# Altium PCB W-F-DX-C1_Display_PCB_wihout3D.PcbDoc
Units mm, origin at the board's own origin, x right, y up, seen from the top; angles counter-clockwise.
Board outline 48.13 x 93.97 mm, 2 copper layers (Top Layer, Bottom Layer); 49 components, 45 nets, 151 pads, 19 vias.
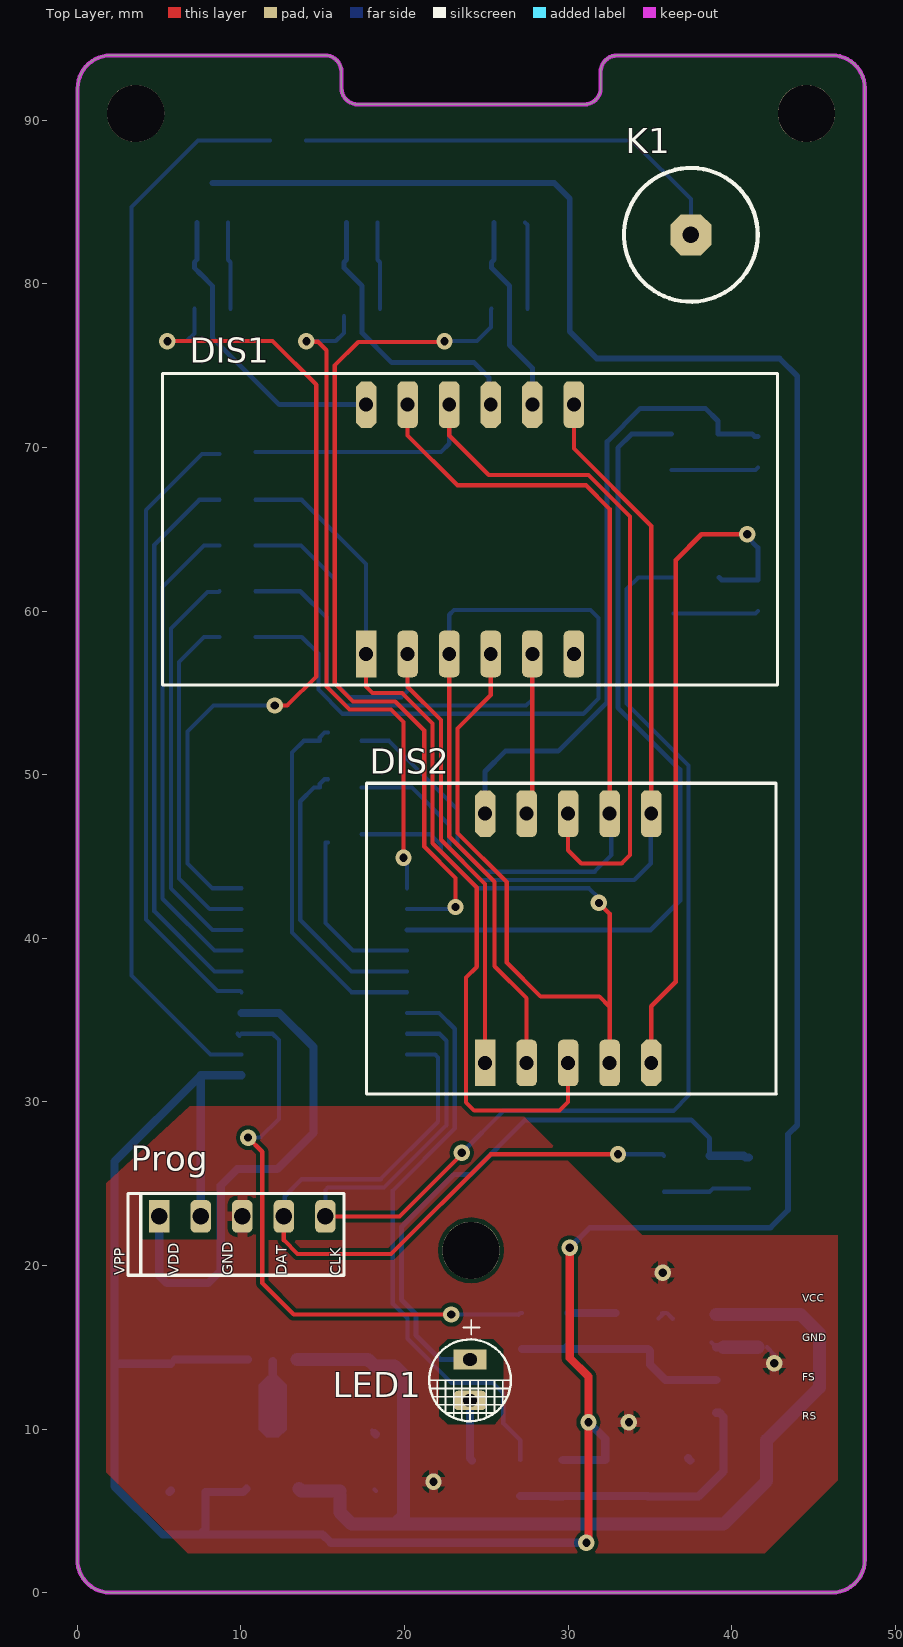
[diagram p0: Top Layer view]
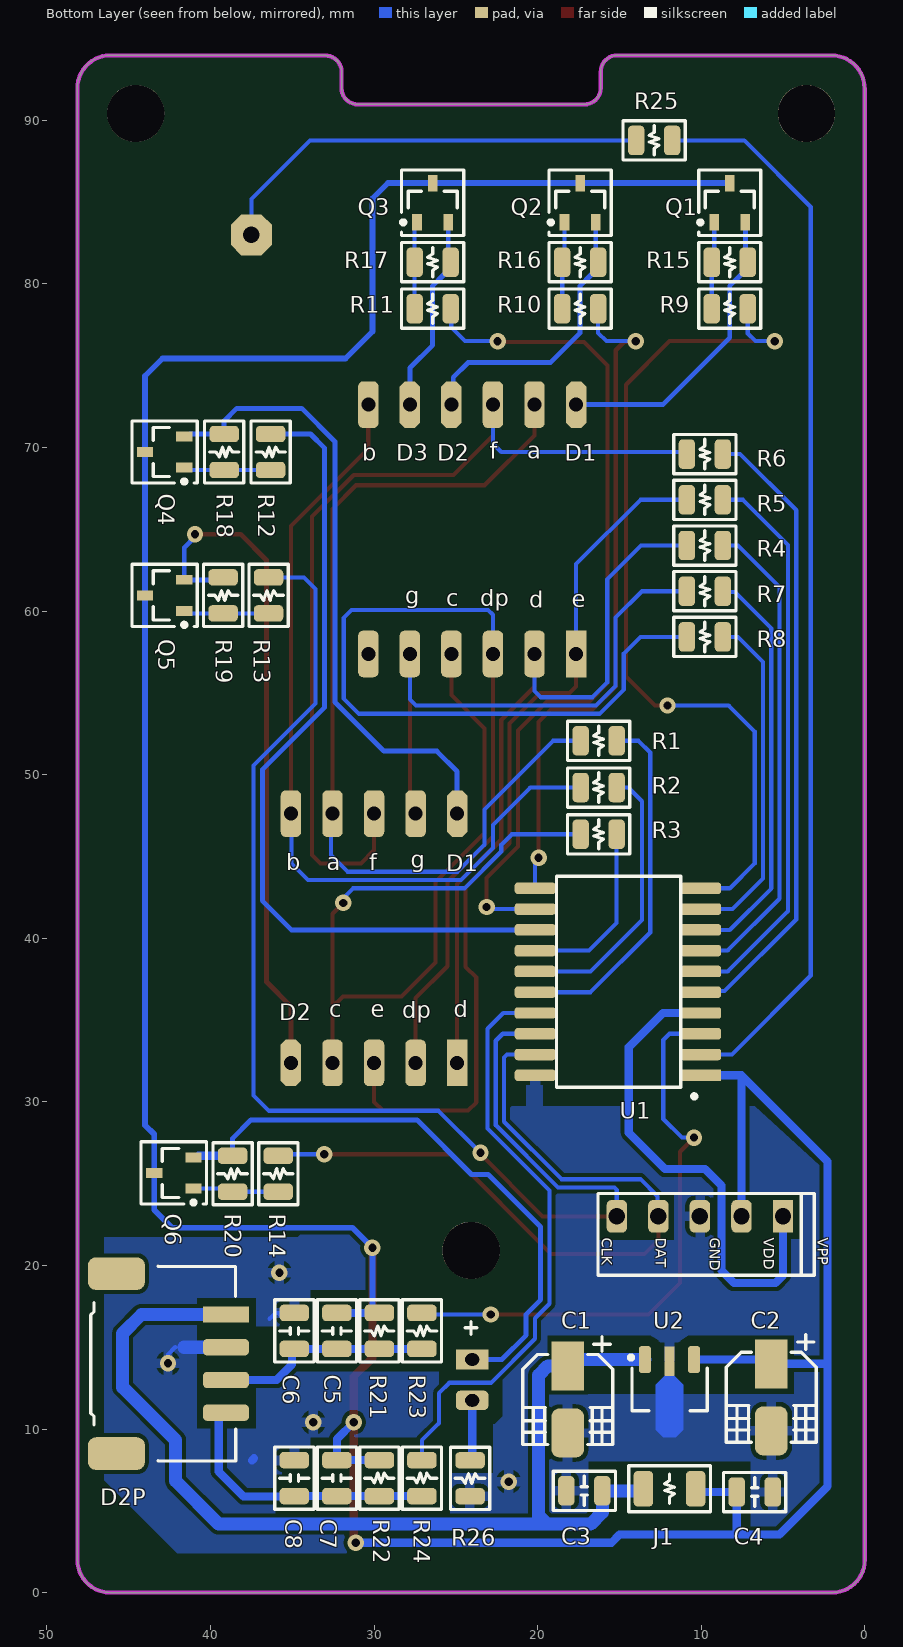
[diagram p1: Bottom Layer view, seen from below]
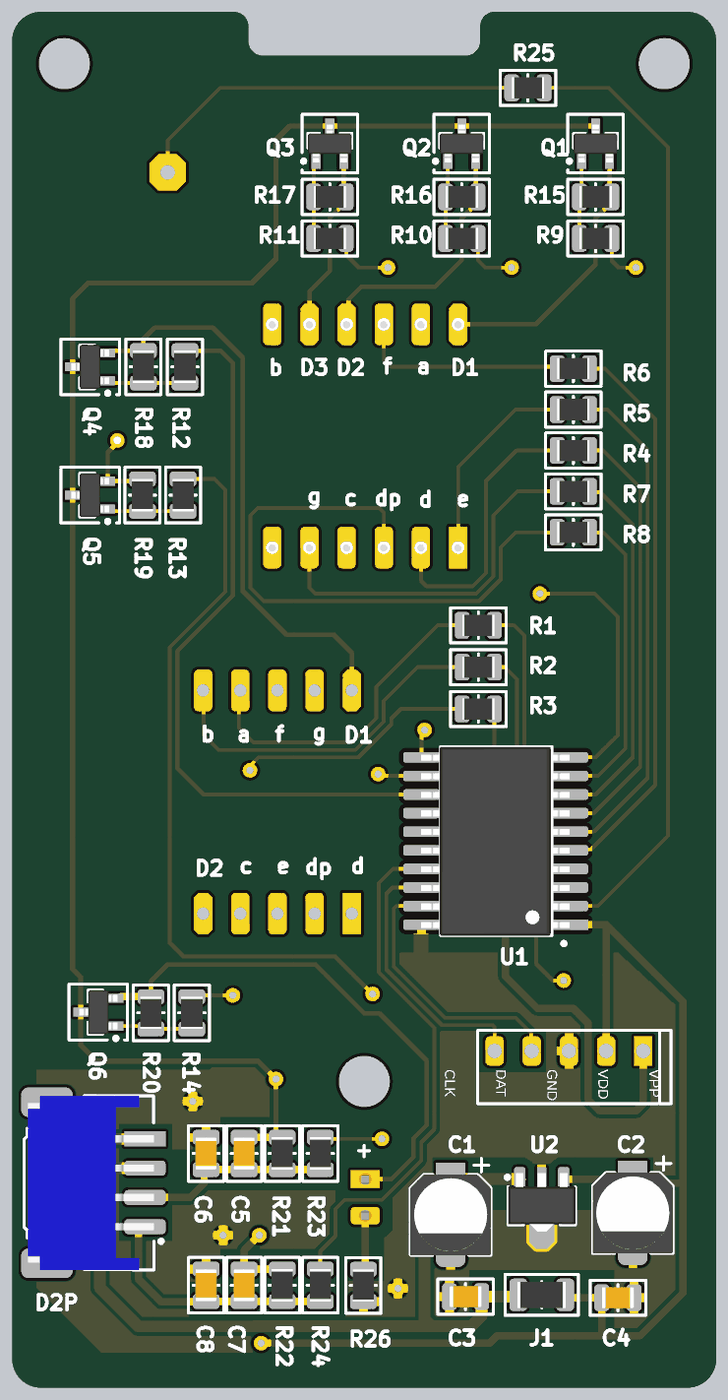
[diagram p2: 3D render of the assembled board from below, using the file's embedded part models]

## Layer stack, top to bottom
Top Solder: solder mask 0.0102, Solder Resist, Dk 3.5
Top Layer: signal copper 0.0356
Dielectric 1: dielectric 0.32, FR-4, Dk 4.8
Bottom Layer: signal copper 0.0356
Bottom Solder: solder mask 0.0102, Solder Resist, Dk 3.5

## Board outline
2,0.002 cw(c2,2.002) 0,2.002 0,91.954 0.015,91.954 cw(c2.031,91.954) 2.031,93.97 15.142,93.97 cw(c15.142,92.97) 16.142,92.97 16.145,92.97 16.145,91.97 ccw(c17.145,91.97) 17.145,90.97 30.988,90.97 ccw(c30.988,91.97) 31.988,91.97 31.984,92.963 cw(c32.984,92.963) 32.984,93.963 32.984,93.97 46.135,93.97 cw(c46.135,91.97) 48.135,91.97 48.135,2.002 48.133,2.002 cw(c46.133,2.002) 46.133,0.002 46.133,0

## Design rules (kind name [scope] priority, off if disabled: settings)
Clearance [All] p1: gap=0.254 ignorepadtopadclearanceinfootprint=TRUE except(0: Arc-Hole Track-Hole SMDPad-Hole THPad-Hole Via-Hole Fill-Hole Poly-Hole Region-Hole Text-Hole)
HoleSize [All] p1: absolutevalues=TRUE maxlimit=5 minlimit=0.3 maxpercent=80.000 minpercent=20.000
MinimumSolderMaskSliver [All] p1: minsoldermaskwidth=0.08
PasteMaskExpansion [All] p1: expansion=0.01
PolygonConnect [All] p1: connectstyle=Relief reliefconductorwidth=0.6 reliefentries=4 polygonreliefangle="90 Angle" airgapwidth=0.254
RoutingVias [All] p1: holewidth=0.5 width=1 viastyle="Through Hole" minholewidth=0.3 minwidth=1 maxholewidth=0.7 maxwidth=1.5
SilkToSolderMaskClearance [IsPad] p1: minsilkscreentomaskgap=0.152 clearancetoexposedcopper=TRUE
SolderMaskExpansion [All] p1: expansion=0.2 istentingtop=FALSE
UnRoutedNet [All] p1: checkbadconnections=TRUE
Width "Power & Ground" [(InNet('GND') AND InNet('VCC') AND InNet('VDD') AND InNet('VPP') AND InNet('dis11') AND InNet('dis12') AND InNet('dis13') AND InNet('dis21') AND InNet('dis22') AND InNet('eco'))] p1: maxlimit=1.5 minlimit=0.3 preferedwidth=0.35
Width [All] p2: maxlimit=5 minlimit=0.254 preferedwidth=0.254
25 further rules are at their usual default settings.

## Components (designator, comment, footprint, x,y, rotation, side; value= is the part's Value field where it differs from the comment)
C1 "C_SMD_5X5.4_CK-47uF-16V" C_SMD_5X5.4_CK-47uF-16V 18.161,11.811 r270 bottom locked
C2 "C_SMD_5X5.4_CK-47uF-16V" C_SMD_5X5.4_CK-47uF-16V 5.715,11.938 r270 bottom locked
C3 "0805 16volts 0.1uF 10%" C_0805 17.145,6.223 r0 bottom locked
C4 "0805 16volts 0.1uF 10%" C_0805 6.731,6.15 r180 bottom locked
C5 "0805 16volts 0.1uF 10%" C_0805 32.273,16 r270 bottom locked
C6 "0805 16volts 0.1uF 10%" C_0805 34.873,16 r270 bottom locked
C7 "0805 16volts 0.1uF 10%" C_0805 32.273,7 r270 bottom locked
C8 "0805 16volts 0.1uF 10%" C_0805 34.873,7 r270 bottom locked
D2P "SM04B-GHS-SMT" CN_4P_A2001WR-S-XP-LCP 42,14 r180 bottom locked
DIS1 "Display_3Digits Seven Segment" "DIS_56\" 3 digit Display" 24,65 r0 top locked
DIS2 "Display_2Digits Seven Segment" "Dis_56\" 2 digit Display" 30,40 r0 top locked
J1 "1206 0Ω 5%" R_1206 11.938,6.35 r180 bottom locked
K1 "TouchSpring-15H-8W-0.5C" T_TouchSpring-15H-8W-0.5C 37.5,83 r0 top locked
LED1 "LED_Diffuse_Green_3x5_P2.5" LED_3x5_P2.5 24,13 r270 top locked
Prog "Connector_PIC_Burn" CN_PIC_MCU_Debugger 5,23 r90 top locked
Q1 "SOT-23-3, BC 847" Q_SOT-23-3_NPN_BC847 8.255,84.963 r180 bottom locked
Q2 "SOT-23-3, BC 847" Q_SOT-23-3_NPN_BC847 17.399,84.963 r180 bottom locked
Q3 "SOT-23-3, BC 847" Q_SOT-23-3_NPN_BC847 26.416,84.963 r180 bottom locked
Q4 "SOT-23-3, BC 847" Q_SOT-23-3_NPN_BC847 42.799,69.723 r90 bottom locked
Q5 "SOT-23-3, BC 847" Q_SOT-23-3_NPN_BC847 42.799,60.96 r90 bottom locked
Q6 "SOT-23-3, BC 847" Q_SOT-23-3_NPN_BC847 42.24,25.654 r90 bottom locked
R1 "0805 220Ω 250mW 5%" R_0805 16.269,52.07 r0 bottom locked
R2 "0805 220Ω 250mW 5%" R_0805 16.269,49.212 r0 bottom locked
R3 "0805 220Ω 250mW 5%" R_0805 16.269,46.355 r0 bottom locked
R4 "0805 220Ω 250mW 5%" R_0805 9.779,64.008 r0 bottom locked
R5 "0805 220Ω 250mW 5%" R_0805 9.779,66.802 r0 bottom locked
R6 "0805 220Ω 250mW 5%" R_0805 9.779,69.596 r0 bottom locked
R7 "0805 220Ω 250mW 5%" R_0805 9.779,61.214 r0 bottom locked
R8 "0805 220Ω 250mW 5%" R_0805 9.779,58.42 r0 bottom locked
R9 "0805 1KΩ 250mW 5%" R_0805 8.255,78.486 r0 bottom locked
R10 "0805 1KΩ 250mW 5%" R_0805 17.399,78.486 r0 bottom locked
R11 "0805 1KΩ 250mW 5%" R_0805 26.416,78.486 r0 bottom locked
R12 "0805 1KΩ 250mW 5%" R_0805 36.322,69.723 r270 bottom locked
R13 "0805 1KΩ 250mW 5%" R_0805 36.449,60.96 r270 bottom locked
R14 "0805 1KΩ 250mW 5%" R_0805 35.852,25.604 r270 bottom locked
R15 "0805 22KΩ 250mW 5%" R_0805 8.255,81.325 r180 bottom locked
R16 "0805 22KΩ 250mW 5%" R_0805 17.399,81.325 r180 bottom locked
R17 "0805 22KΩ 250mW 5%" R_0805 26.416,81.325 r180 bottom locked
R18 "0805 22KΩ 250mW 5%" R_0805 39.161,69.723 r90 bottom locked
R19 "0805 22KΩ 250mW 5%" R_0805 39.224,60.96 r90 bottom locked
R20 "0805 22KΩ 250mW 5%" R_0805 38.646,25.604 r90 bottom locked
R21 "0805 10KΩ 250mW 1%" R_0805 29.673,16 r270 bottom locked
R22 "0805 10KΩ 250mW 1%" R_0805 29.673,7 r270 bottom locked
R23 "0805 22KΩ 250mW 5%" R_0805 27.073,16 r270 bottom locked
R24 "0805 22KΩ 250mW 5%" R_0805 27.073,7 r270 bottom locked
R25 "0805 1KΩ 250mW 5%" R_0805 12.878,88.773 r180 bottom locked
R26 "0805 3.6KΩ 250mW 5%" R_0805 24.13,6.985 r90 bottom locked
U1 "IC_PIC16F15344_SOIC" U_PIC16F1XXXX_20pin_SOIC 15.126,37.338 r0 bottom locked
U2 "CJ78L05 Three-terminal positive voltage regulator" U_CJ78L05_SOT89 11.938,12.446 r270 bottom locked

## Footprints (in the part's own frame and the unit in brackets; to place one, negate y for a bottom-side part, rotate by r counter-clockwise, add the part's x,y. Pads: shape width x height; smd on the part's side, far side on the other; paste and mask are expansions set on the pad)
C_0805 [mm]
  rrect50% 1x1.8 smd: 1(-1.1,0) 2(1.1,0)
  silkscreen extent -1.9,-1.2 1.9,1.2, body extent -1.1,-0.72 1.1,0.72, height 1
C_SMD_5X5.4_CK-47uF-16V [mm] "Aluminum Electrolytic Capacitor, Body 5.30x5.30x5.80mm, IPC Low Density"
  rect 3x2 smd: 1(-2.05,0)
  rrect50% 3x2 smd: 2(2.05,0)
  silkscreen extent -3.85,-2.75 2.75,2.75, body extent -2.77,-2.75 2.77,2.75, height 5.8
CN_4P_A2001WR-S-XP-LCP [mm]
  rrect50% 3.5x2 smd: 0(-3.75,-5.5) 0(-3.75,5.5)
  rrect50% 2.8x1 smd: 1(2.95,-3) 2(2.95,-1) 3(2.95,1)
  rect 2.8x1 smd: 4(2.95,3)
  round 0.5 on Bottom Overlay: ""(4.05,-4)
  silkscreen extent -5.31,-5.95 3.55,5.94, body extent -5.05,-5.95 3.55,5.95, height 5.6
CN_PIC_MCU_Debugger [mm]
  rect 2x1.25 hole 1: 1(0,0)
  rrect50% 2x1.25 hole 1: 2(0,-2.54) 3(0,-5.08) 4(0,-7.62) 5(0,-10.16)
  silkscreen extent -3.6,-11.3 1.4,1.9
"Dis_56\" 2 digit Display" [mm]
  rect 1.25x2.85 hole 0.85: 1(-5.08,-7.62)
  rrect50% 1.25x2.85 hole 0.85: 2(-2.54,-7.62) 3(0,-7.62) 4(2.54,-7.62) 6(5.08,7.62) 7(2.54,7.62) 8(0,7.62) 9(-2.54,7.62)
  oct 1.25x2.85 hole 0.85: 5(5.08,-7.62) 10(-5.08,7.62)
  silkscreen extent -12.32,-9.52 12.72,9.48, body extent -12.32,-9.52 12.72,9.61, height 7
"DIS_56\" 3 digit Display" [mm]
  rect 1.25x2.85 hole 0.85: 1(-6.35,-7.62)
  rrect50% 1.25x2.85 hole 0.85: 2(-3.81,-7.62) 3(-1.27,-7.62) 4(1.27,-7.62) 5(3.81,-7.62) 6(6.35,-7.62) 7(6.35,7.62) 10(-1.27,7.62) 11(-3.81,7.62)
  oct 1.25x2.85 hole 0.85: 8(3.81,7.62) 9(1.27,7.62) 12(-6.35,7.62)
  silkscreen extent -18.8,-9.53 18.8,9.53, body extent -18.8,-9.52 18.8,9.48, height 8.1
LED_3x5_P2.5 [mm]
  rect 1.2x2 hole 0.85 slot 0.75 at 0 deg: 1(-1.25,0)
  rrect50% 1.2x2 hole 0.85 slot 0.75 at 0 deg: 2(1.25,0)
  silkscreen extent -3.67,-2.5 2.52,2.5, body extent -1.97,-1.5 2.01,1.99, height 5.38
Q_SOT-23-3_NPN_BC847 [mm] "SOT23, 3-Leads, Body 2.90x2.45mm, Pitch 0.95mm, IPC Medium Density"
  rect 0.6x1 smd: 1(-0.95,-1.2) 2(0.95,-1.2) 3(0,1.2)
  silkscreen extent -1.93,-2 1.9,2, body extent -1.5,-1.3 1.5,1.3, height 1.15
R_0805 [mm]
  rrect50% 1x1.8 smd: 1(-1.1,0) 2(1.1,0)
  silkscreen extent -1.9,-1.2 1.9,1.2, body extent -1.1,-0.72 1.1,0.72, height 0.65
R_1206 [mm]
  rrect50% 1.2x2.2 smd: 1(-1.6,0) 2(1.6,0)
  silkscreen extent -2.5,-1.4 2.5,1.4, body extent -1.65,-0.9 1.65,0.9, height 0.65
T_TouchSpring-15H-8W-0.5C [mm]
  oct 2.5x2.5 hole 1: 1(0,0)
  silkscreen extent -4.09,-4.09 4.09,4.09, body extent -4,-4 4,4, height 15
U_CJ78L05_SOT89 [mm] "SOT89, 3-Leads, Body 4.50x2.45mm, Pitch 1.50mm, Lead Span 4.1mm - Reverse Pinning, IPC Medium Density"
  rrect50% 1.65x0.75 smd: 1(-1.8,1.5) 3(-1.8,-1.5)
  rect 1.8x0.6 smd: 2(-1.7,0)
  Top Layer region: -0.8,0.3 -0.25,0.85 2.479,0.85 2.948,0.381 2.948,-0.381 2.479,-0.85 -0.25,-0.85 -0.8,-0.3
  silkscreen extent -2.05,-2.48 1.32,2.3, body extent -2.2,-2.3 1.8,2.3, height 1.6
U_PIC16F1XXXX_20pin_SOIC [mm] "SOIC, 20-Leads, Body 12.80x7.50mm, Pitch 1.27mm, IPC Medium Density"
  rect 2.5x0.7 smd mask+0.3: 1(-5.1,5.715)
  rrect50% 2.5x0.7 smd mask+0.3: 2(-5.1,4.445) 3(-5.1,3.175) 4(-5.1,1.905) 5(-5.1,0.635) 6(-5.1,-0.635) 7(-5.1,-1.905) 8(-5.1,-3.175) 9(-5.1,-4.445) 10(-5.1,-5.715) 11(5.025,-5.715) 12(5.025,-4.445) 13(5.025,-3.175) 14(5.025,-1.905) 15(5.025,-0.635) 16(5.025,0.635) 17(5.025,1.905) 18(5.025,3.175) 19(5.025,4.445)
  rrect50% 2.5x0.7 smd paste+0 mask+0.3: 20(5.025,5.715)
  silkscreen extent -4.82,-6.45 3.73,7.12, body extent -5.1,-6.42 5.05,6.48, height 2.65

## Part data
C1 C2: library part "Capacitor Polar"
C3 C4 C5 C6 C7 C8: library part "Capacitor Non-Polar"
D2P: library part Connector_4PINs
DIS1: "3 Digit Seven Segment Display CA"
DIS2: "2 Digit Seven Segment Display CA"
J1 R1 R2 R3 R4 R5 R6 R7 R8 R9 R10 R11 R12 R13 R14 R15 R16 R17 R18 R19 R20 R21 R22 R23 R24 R25 R26: library part Resistor
K1: library part Touch_Spring
LED1: library part LED
Q1 Q2 Q3 Q4 Q5 Q6: library part BJT_npn
U1: library part IC_PIC16F1XXXX_20PIN
U2: library part "Voltage Regulator_CJ78L05"

## Free pads (board coordinates)
  round 3.5 hole 3.5 unplated: 0(3.565,90.42) 0(24.065,20.92) 0(44.565,90.42)

## Via types
v1: diameter 1, hole 0.5, Top Layer to Bottom Layer, 19 vias

## Nets (pads, with @x,y where several pads share a name; then routed paths per layer and width w, separated by ;. In a path a pad name is that pad's centre, name@x,y a point inside that pad or via, vN(x,y) a via of type N, cw(c..) or ccw(c..) an arc to the next point about the centre after c; other vN are vias at no path point)
_a: R1.1 U1.16 | length 22.4
  Bottom Layer w0.254: R1.1@15.324,52.578 15.114,52.578 14.816,52.28 14.816,52.07 13.84,52.07 13.117,51.347 13.117,40.35 16.764,36.703 U1.16
_b: R2.1 U1.15 | length 17.5
  Bottom Layer w0.254: R2.1@15.324,49.721 15.114,49.721 14.816,49.423 14.816,49.213 14.461,49.213 13.625,48.377 13.625,41.112 16.764,37.973 U1.15
_c: R3.1 U1.14 | length 10.8
  Bottom Layer w0.254: R3.1@15.324,45.847 15.169,45.847 15.169,40.928 16.853,39.243 U1.14
_d: R4.1 U1.7 | length 29.7
  Bottom Layer w0.254: R4.1 7.747,64.008 5.207,61.468 5.207,42.418 8.382,39.243 U1.7
_dis11: R9.1 U1.10 | length 52.7
  Top Layer w0.254: v1(5.5,76.5) 11.938,76.5 14.605,73.833 14.605,56.007 12.827,54.229 v1(12.065,54.229)
  Bottom Layer w0.254: v1(5.5,76.5) 6.685,76.5 7.155,76.97 R9.1 ; U1.10 8.255,43.053 6.731,44.577 6.731,52.639 8.321,54.229 v1(12.065,54.229)
_dis12: R10.1 U1.11 | length 41
  Top Layer w0.254: v1(14,76.5) 14.035,76.465 14.703,76.465 15.222,75.946 15.222,55.389 16.636,53.975 19.177,53.975 19.939,53.213 v1(19.939,44.921)
  Bottom Layer w0.254: v1(14,76.5) 15.794,76.5 16.299,77.005 R10.1@16.299,78.019 ; U1.11 v1@20.151,44.597
_dis13: R11.1 U1.12 | length 52.3
  Top Layer w0.254: v1@22.446,76.454 17.171,76.454 15.73,75.014 15.73,55.599 16.847,54.483 19.431,54.483 21.206,52.708 21.206,45.6 23.116,43.69 v1(23.116,41.911)
  Bottom Layer w0.254: U1.12 22.988,41.783 v1(23.116,41.911) ; v1(22.446,76.5) 24.43,76.5 25.284,77.354 25.284,78.454 R11.1
_dis21: R12.1 U1.13 | length 50.3
  Bottom Layer w0.3: U1.13 35.052,40.513 36.83,42.291 36.83,50.311 33.039,54.102 33.039,69.977 33.885,70.823 R12.1
_dis22: Prog.5 R13.1 U1.18 | length 79.5
  Top Layer w0.254: Prog.5 19.698,23 v1@23.622,26.924
  Bottom Layer w0.254: Prog.5 15.16,24.616 15.309,24.765 18.752,24.765 22.561,28.573 22.561,33.735 22.133,34.163 U1.18 ; v1(23.495,26.89) 26.058,29.453 36.431,29.453 37.361,30.383 37.361,50.565 33.57,54.356 33.57,61.341 34.289,62.06 R13.1
_dp: R8.1 U1.9 | length 20.9
  Bottom Layer w0.254: R8.1 7.747,58.42 6.223,56.896 6.223,43.649 8.089,41.783 U1.9
_e: R5.1 U1.6 | length 34.4
  Bottom Layer w0.254: R5.1 7.451,66.802 4.699,64.05 4.699,41.656 8.382,37.973 U1.6
_eco: Prog.4 R14.1 U1.19 | length 46
  Top Layer w0.254: Prog.4 12.62,21.543 13.462,20.701 19.177,20.701 25.273,26.797 v1(33.048,26.797)
  Bottom Layer w0.254: Prog.4 12.675,23.055 12.675,24.232 13.716,25.273 18.542,25.273 22.053,28.784 22.053,32.713 21.872,32.893 U1.19 ; v1(33.048,26.797) 35.759,26.797 R14.1
_f: R6.1 U1.5 | length 38.6
  Bottom Layer w0.254: R6.1 7.62,69.596 4.191,66.167 4.191,41.148 8.567,36.772 9.956,36.772 U1.5
_fs: R23.1 U1.3 | length 35.8
  Top Layer w0.254: v1(10.438,27.813) 11.303,26.948 11.303,18.923 13.226,17 v1(22.86,17)
  Bottom Layer w0.254: U1.3@9.779,34.163 U1.3@9.902,34.04 ; U1.3 11.938,34.163 12.319,33.782 12.319,28.956 11.176,27.813 v1(10.438,27.813) ; v1(22.86,17) 26.921,17 26.946,16.975 27.073,17.102 R23.1@27.178,17.102
_g: R7.1 U1.8 | length 25.1
  Bottom Layer w0.254: R7.1 8.625,61.16 7.947,61.16 5.715,58.928 5.715,43.053 8.255,40.513 U1.8
_k1: R25.2 U1.2 | length 65.9
  Bottom Layer w0.254: U1.2 8.128,32.893 3.302,37.719 3.302,84.709 7.366,88.773 R25.2
_rs: R24.1 U1.17 | length 36
  Bottom Layer w0.254: U1.17 22.104,35.433 23.069,34.468 23.069,28.363 19.282,24.576 19.282,17.66 20.17,16.771 20.17,15.517 22.86,12.827 25.4,12.827 26.035,12.192 26.035,10.357 27.073,9.319 R24.1
dis11: DIS1.12 Q1.2 R15.2 | length 18.7
  Bottom Layer w0.3: Q1.2 7.305,81.475 R15.2 7.155,80.979 7.559,80.575 7.563,80.575 8.255,79.883 8.255,76.708 12.343,72.62 DIS1.12
dis12: DIS1.9 Q2.2 R16.2 | length 17.9
  Bottom Layer w0.3: Q2.2 16.449,81.475 R16.2 16.299,80.979 16.703,80.575 16.707,80.575 17.4,79.882 17.4,77.005 19.221,75.184 24.257,75.184 25.159,74.282 25.159,72.731 DIS1.9
dis13: DIS1.8 Q3.2 R17.2 | length 12.2
  Bottom Layer w0.3: Q3.2 25.466,81.475 R17.2 25.316,80.979 25.72,80.575 25.724,80.575 26.416,79.883 26.416,76.254 27.81,74.86 DIS1.8
dis21: DIS2.10 Q4.2 R18.2 | length 39
  Bottom Layer w0.3: DIS2.10 24.92,50.193 26.162,51.435 29.39,51.435 32.385,54.43 32.385,70.358 34.417,72.39 38.389,72.39 39.161,71.619 R18.2 41.249,70.823 41.399,70.673 Q4.2
dis22: DIS2.5 Q5.2 R19.2 | length 42
  Top Layer w0.3: DIS2.5 35.08,35.842 36.576,37.338 36.576,63.119 38.154,64.697 v1(40.944,64.697)
  Bottom Layer w0.3: R19.2 39.374,61.91 Q5.2 41.599,63.881 40.944,64.536 v1(40.944,64.697)
  Bottom Layer w0.5: v1(40.944,64.697) v1@41.094,64.697
eco: LED1.1 Q6.2 R20.2 | length 36.4
  Bottom Layer w0.3: LED1.1 22.188,14.25 20.701,15.737 20.701,17.018 19.813,17.906 19.813,22.352 23.024,25.563 24.039,25.563 27.377,28.901 37.52,28.901 38.646,27.775 R20.2
  Bottom Layer w0.5: R20.2 40.74,26.704 40.84,26.604 Q6.2
FS: C5.2 C6.2 D2P.2 R21.2 R23.2 | length 13.3
  Bottom Layer w0.5: R23.2@27.178,14.902 R21.2@30.036,14.902 ; R21.2@29.948,15.029 30.075,14.902 34.873,14.902 35.009,14.766 35.009,13.943 35.952,13 D2P.2
GND: C1.2 C2.2 C3.2 C4.2 C6.1 C8.1 D2P.3 Prog.3 R26.1 U1.20 U2.2 | length 10.5
  Bottom Layer w0.254: 11.839,9.888 11.857,9.906 12.065,9.906 ; C1.2@18.016,9.906 C1.2 ; C3.2@18.161,6.307 C3.2 ; C6.1@35.528,16.75 C6.1@35.753,16.975 ; C6.1@35.753,17.102 36.032,17.102 36.395,16.738 ; D2P.3@38.755,15.295 D2P.3 ; 42.154,15 42.595,14.559 v1(42.595,14.021)
  Bottom Layer w0.5: C4.2 C4.2@5.715,6.234 ; U2.2 11.938,10.033 12.065,9.906 ; C1.2 C1.2@18.245,9.677 ; 37.338,8.212 37.465,8.085 ; D2P.3 D2P.3@39.497,15
  Bottom Layer w0.8: D2P.3@39.497,15 41.616,15
  other v1: 21.767,6.782 33.712,10.414 35.786,19.558
NetDIS1_1: DIS1.1 DIS2.3 R5.2 | length 54.5
  Top Layer w0.254: DIS1.1 17.65,55.389 18.048,54.991 19.856,54.991 21.714,53.133 21.714,45.81 24.412,43.112 24.412,38.255 23.749,37.592 23.749,29.972 24.257,29.464 29.464,29.464 30,30 DIS2.3
  Bottom Layer w0.254: R5.2 13.716,66.802 17.65,62.868 DIS1.1
NetDIS1_2: DIS1.2 DIS2.1 R4.2 | length 46.3
  Top Layer w0.254: DIS1.2 20.19,55.375 22.222,53.343 22.222,46.021 24.92,43.323 DIS2.1
  Bottom Layer w0.254: R4.2 13.673,64.008 15.748,61.933 15.748,55.626 16.637,54.737 19.812,54.737 20.19,55.115 DIS1.2@20.19,57.429
NetDIS1_3: DIS1.3 DIS2.2 R8.2 | length 68.3
  Top Layer w0.254: DIS1.3 22.73,46.231 25.508,43.453 25.508,38.29 27.46,36.338 DIS2.2
  Bottom Layer w0.254: R8.2 13.716,58.42 14.732,57.404 14.732,55.205 16.216,53.721 30.925,53.721 31.854,54.65 31.854,59.586 31.369,60.071 23.024,60.071 22.73,59.777 DIS1.3
NetDIS1_4: DIS1.4 DIS2.4 R3.2 | length 55.1
  Top Layer w0.254: DIS1.4 25.27,54.861 23.238,52.829 23.238,46.441 26.245,43.434 26.245,38.525 28.321,36.449 31.905,36.449 32.54,35.814 ; v1(31.877,42.164) 32.54,41.501 DIS2.4
  Bottom Layer w0.254: R3.2 21.582,46.355 22.225,45.712 22.225,45.299 24.471,43.053 31.284,43.053 31.877,42.46 v1(31.877,42.164)
NetDIS1_5: DIS1.5 DIS2.9 R7.2 | length 35.1
  Top Layer w0.254: DIS2.9 27.81,47.97 DIS1.5
  Bottom Layer w0.254: R7.2 13.625,61.214 15.24,59.599 15.24,55.416 16.427,54.229 27.432,54.229 27.81,54.607 DIS1.5
NetDIS1_7: DIS1.7 DIS2.6 R2.2 | length 51.3
  Top Layer w0.254: DIS1.7 30.35,69.936 35.08,65.206 DIS2.6
  Bottom Layer w0.254: R2.2 20.447,49.213 22.733,46.927 22.733,45.51 24.682,43.561 34.044,43.561 35.052,44.569 35.052,47.592 DIS2.6
NetDIS1_10: DIS1.10 DIS2.8 R6.2 | length 56.7
  Top Layer w0.254: DIS1.10 22.73,70.742 25.146,68.326 31.242,68.326 33.782,65.786 33.782,45.085 33.274,44.577 30.803,44.577 30,45.38 DIS2.8
  Bottom Layer w0.254: R6.2@10.879,69.723 22.225,69.723 22.73,70.228 DIS1.10
NetDIS1_11: DIS1.11 DIS2.7 R1.2 | length 57.6
  Top Layer w0.254: DIS1.11 20.19,70.742 23.241,67.691 31.099,67.691 32.54,66.25 DIS2.7
  Bottom Layer w0.254: R1.2 19.05,52.07 23.241,47.879 23.241,45.72 24.892,44.069 31.623,44.069 32.639,45.085 32.639,47.521 DIS2.7
NetK1_1: K1.1 R25.1 | length 27.2
  Bottom Layer w0.254: R25.1 15.552,88.773 33.909,88.773 37.5,85.182 K1.1
NetLED1_2: LED1.2 R26.2 | length 3.7
  Bottom Layer w0.5: LED1.2 24,8.216 R26.2
NetQ1_1: Q1.1 R9.2 R15.1 | length 5.3
  Bottom Layer w0.254: Q1.1 9.205,81.475 R15.1 R9.2
NetQ2_1: Q2.1 R10.2 R16.1 | length 5.3
  Bottom Layer w0.254: Q2.1 18.349,81.475 R16.1 R10.2
NetQ3_1: Q3.1 R11.2 R17.1 | length 5.3
  Bottom Layer w0.254: Q3.1 27.516,83.613 R17.1 R11.2
NetQ4_1: Q4.1 R12.2 R18.1 | length 5.3
  Bottom Layer w0.254: R12.2 R18.1 41.449,68.623 Q4.1
NetQ5_1: Q5.1 R13.2 R19.1 | length 5.2
  Bottom Layer w0.254: R13.2 R19.1 41.449,59.86 Q5.1
NetQ6_1: Q6.1 R14.2 R20.1 | length 5.3
  Bottom Layer w0.254: R14.2 R20.1 38.846,24.704 Q6.1
RS: C7.2 C8.2 D2P.1 R22.2 R24.2 | length 17.7
  Bottom Layer w0.5: R24.2 R22.2 C7.2 C8.2 ; R22.2@28.956,5.885 R22.2@29.673,5.885 ; C8.2@34.873,5.885 37.972,5.885 39.497,7.41 39.497,10.75 39.247,11 D2P.1
VCC: C1.1 C3.1 D2P.4 J1.1 U2.3 | length 64.7
  Bottom Layer w0.254: C3.1@16.045,5.969 C3.1
  Bottom Layer w0.8: U2.3 17.776,14.246 C1.1 19.37,13.861 19.941,13.29 19.941,4.701 19.442,4.202 ; J1.1 13.665,6.223 C3.1 ; C3.1@16.045,5.969 16.045,4.91 16.764,4.191 16.775,4.202 19.442,4.202 ; D2P.4 44.214,17 45.364,15.85 45.364,12.548 42.129,9.313 42.129,6.823 39.497,4.191 31.604,4.191 31.593,4.202 19.442,4.202
VDD: C2.1 C4.1 C5.1 C7.1 J1.2 Prog.2 Q1.3 Q2.3 Q3.3 Q4.3 Q5.3 Q6.3 R21.1 R22.1 U1.1 U2.1 | length 223.6
  Top Layer w0.5: v1(30.099,21.082) 30.099,14.351 31.242,13.208 v1(31.242,10.414) 31.242,3.31 31.115,3.183 v1(31.115,3.048)
  Bottom Layer w0.35: Q1.3 Q2.3 Q3.3 29.153,86.163 30.099,85.217 30.099,77.089 31.75,75.438 42.926,75.438 43.999,74.365 Q4.3 Q5.3 43.999,28.575 43.44,28.016 Q6.3 43.44,23.384 42.369,22.313 31.33,22.313 v1(30.099,21.082) 30.099,17.165 R21.1@30.036,17.102
  Bottom Layer w0.5: C2.1 2.433,13.988 2.275,14.146 ; C2.1@5.973,14.246 U2.1 ; Prog.2 7.54,31.623 ; U1.1 7.54,31.623 ; J1.2 10.138,6.15 C4.1 7.831,3.894 7.493,3.556 ; R22.1 C7.1 32.273,9.383 v1(31.242,10.414) ; R21.1@30.036,17.102 C5.1@32.895,17.102 ; v1(31.115,3.048) 15.494,3.048 14.986,3.556 7.493,3.556 ; 2.275,14.146 2.275,6.499 5.218,3.556 7.493,3.556 ; 2.275,14.146 2.275,26.358 7.54,31.623
VPP: Prog.1 U1.4 | length 30.6
  Bottom Layer w0.5: Prog.1 5,19.384 5.461,18.923 8.001,18.923 8.763,19.685 8.763,24.892 9.775,25.904 12.222,25.904 14.425,28.107 14.425,33.348 12.34,35.433 U1.4
pads on no net: D2P. D2P.0 DIS1.6

## Polygon pours and split planes (outlines as drawn)
GND on Top Layer "GND_L01_P000" (solid, remove dead copper, pour order 0): 6.858,29.718 26.67,29.718 34.544,21.844 46.482,21.844 46.482,6.858 42.017,2.393 6.751,2.393 1.778,7.366 1.778,25.019
GND on Bottom Layer "Bottom Layer-GND" (solid, remove dead copper, pour order 4): 9.77,32.512 23.876,32.512 34.671,21.717 46.482,21.717 46.482,6.858 42.017,2.393 5.989,2.393 1.778,6.604 1.778,25.204

## Keep-outs
Keep-Out Layer:
  lines w0.254: 0,91.954 0,2.002 ccw(c2,2.002) 2,0.002 ; 0.015,91.954 cw(c2.031,91.954) 2.031,93.97 15.142,93.97 cw(c15.142,92.97) 16.142,92.97 ; 2,0 46.133,0 ; 16.145,92.97 16.145,91.97 ccw(c17.145,91.97) 17.145,90.97 30.988,90.97 ccw(c30.988,91.97) 31.988,91.97 31.984,92.963 cw(c32.984,92.963) 32.984,93.963 ; 32.984,93.97 46.135,93.97 cw(c46.135,91.97) 48.135,91.97 48.135,2.002 ; 46.133,0.002 ccw(c46.133,2.002) 48.133,2.002

## Other copper
Bottom Layer:
  pour cut-out: 24.701,18.509 33.909,18.509 33.909,16.275 37.338,16.275 37.338,13.493 34.039,13.493 24.701,13.493
  pour cut-out: 22.71,7.304 22.71,10.287 25.421,10.287 25.421,7.304
  pour cut-out: 6.985,8.045 16.891,8.045 16.891,4.064 6.985,4.064
  pour cut-out: 4.318,15.748 10.795,15.748 11.284,15.4 11.284,12.126 12.592,12.126 12.592,15.432 13.124,15.748 19.415,15.748 19.415,12.126 4.318,12.126
  pour cut-out: 1.651,29.718 1.651,44.069 21.321,44.069 22.098,43.292 22.098,29.738 20.701,29.721 20.701,31.977 19.685,31.977 19.685,29.718
  pour cut-out: 37.211,10.033 37.211,18.034 40.84,18.034 40.84,10.033
  pour cut-out: 25.336,9.492 33.909,9.492 33.909,7.231 36.032,7.231 36.032,4.476 25.336,4.476
  pour cut-out: 44.535,23.146 34.248,23.146 34.248,28.162 44.535,28.162
  pour cut-out: 45.148,58.326 34.861,58.326 34.862,63.342 45.149,63.342
  pour cut-out: 44.895,67.216 34.608,67.216 34.608,72.232 44.895,72.232
  pour cut-out: 24.036,76.962 24.036,87.249 29.052,87.249 29.052,76.962
  pour cut-out: 14.892,76.898 14.892,87.185 19.908,87.185 19.908,76.898
  pour cut-out: 5.779,76.962 5.779,87.249 10.795,87.249 10.795,76.962
  pour cut-out: 13.676,44.363 13.676,53.793 18.692,53.793 18.692,44.363
  pour cut-out: 6.604,55.899 6.604,71.667 13.06,71.667 13.06,55.899
Multi-Layer:
  pour cut-out: 16.339,21.543 11.661,21.543 11.661,24.457 16.339,24.457
  pour cut-out: 8.509,21.59 3.831,21.59 3.831,24.504 8.509,24.504
  pour cut-out: 26.035,10.924 25.504,10.287 22.626,10.287 22.133,10.78 22.133,15.001 22.626,15.494 25.42,15.494 26.035,14.879
  pour cut-out: 23.692,34.544 36.506,34.544 36.506,29.845 23.692,29.845
  pour cut-out: 23.635,49.784 36.449,49.784 36.449,45.085 23.635,45.085
  pour cut-out: 16.037,59.436 31.804,59.436 31.804,54.737 16.037,54.737
  pour cut-out: 16.142,75.057 31.909,75.057 31.909,70.358 16.142,70.358

## Silkscreen, mask and mechanical layers (free items; w line width, h text height)
Top Overlay:
  text "VCC /  /  / GND /  /  / FS /  /  / RS" at 44.323,10.414 h0.8
Bottom Overlay:
  lines w0.2: 23.703,16.19 24.445,16.19 ; 24.074,15.783 24.074,16.556

## Text inside footprints (layer, text, board x,y; h text height)
DIS1: Bottom Overlay "D1" at 18.33,69.2 h1; Bottom Overlay "D2" at 26.13,69.2 h1; Bottom Overlay "D3" at 28.64,69.2 h1; Bottom Overlay "d" at 20.5,60.2 h1; Bottom Overlay "dp" at 23.5,60.3 h1; Bottom Overlay "e" at 17.9,60.233 h1; Bottom Overlay "c" at 25.6,60.3 h1; Bottom Overlay "g" at 28.1,60.433 h1; Bottom Overlay "f" at 22.93,69.3 h1; Bottom Overlay "b" at 30.73,69.2 h1; Bottom Overlay "a" at 20.63,69.3 h1
DIS2: Bottom Overlay "d" at 25.122,35.167 h1; Bottom Overlay "dp" at 28.262,35.1 h1; Bottom Overlay "e" at 30.201,35.167 h1; Bottom Overlay "c" at 32.742,35.167 h1; Bottom Overlay "g" at 27.76,44.3 h1; Bottom Overlay "f" at 30.301,44.167 h1; Bottom Overlay "b" at 35.38,44.167 h1; Bottom Overlay "a" at 32.9,44.167 h1; Bottom Overlay "D1" at 25.6,44.1 h1; Bottom Overlay "D2" at 35.8,35 h1
Prog: Bottom Overlay "VPP /  /  / VDD /  /  / GND /  /  / DAT /  /  / CLK" at 16.305,21.7 h1.1 r90; Top Overlay "VPP /  /  / VDD /  /  / GND /  /  / DAT /  /  / CLK" at 16.3,19.4 h1.1 r90